# Altium PCB Mikrolysreklamen17.PcbDoc (part 1 of 2)
Units mm, origin at the board's own origin, x right, y up, seen from the top; angles counter-clockwise.
Board outline 168.74 x 42.98 mm, 2 copper layers (Top Layer, Bottom Layer), stack 1.671 mm thick; 124 components, 180 nets, 652 pads, 157 vias.
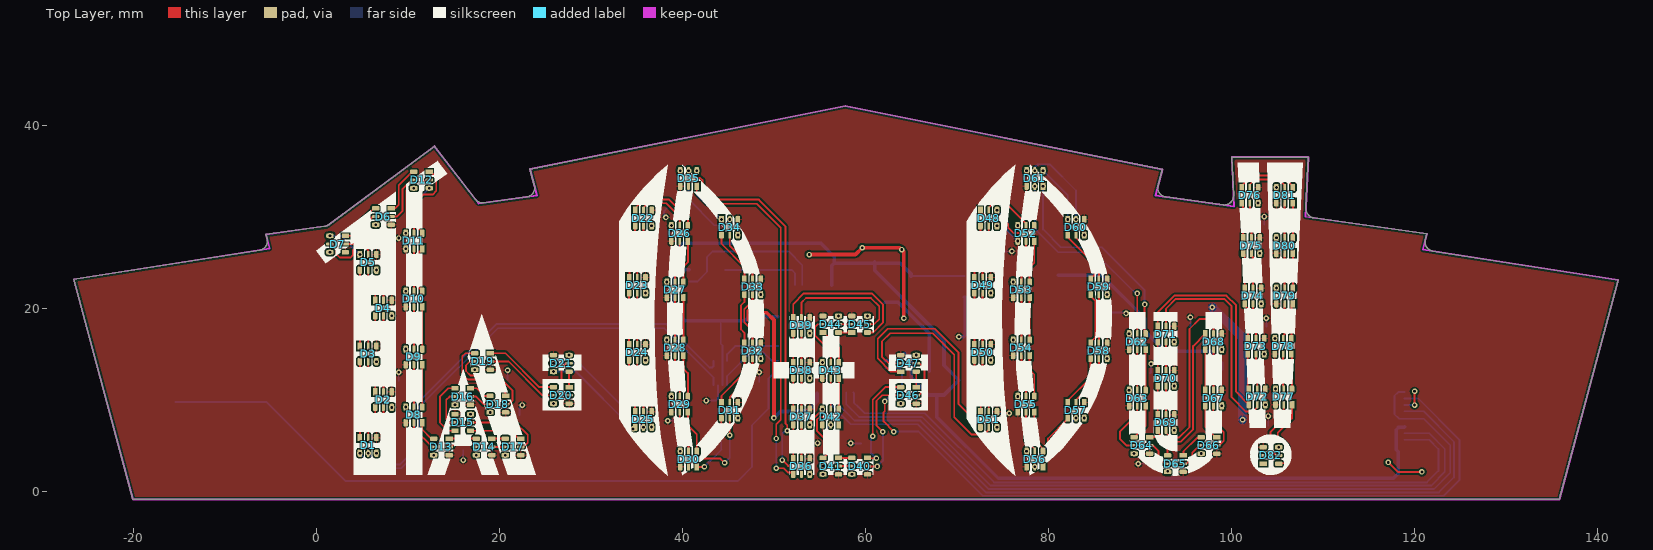
[diagram p0: Top Layer view]
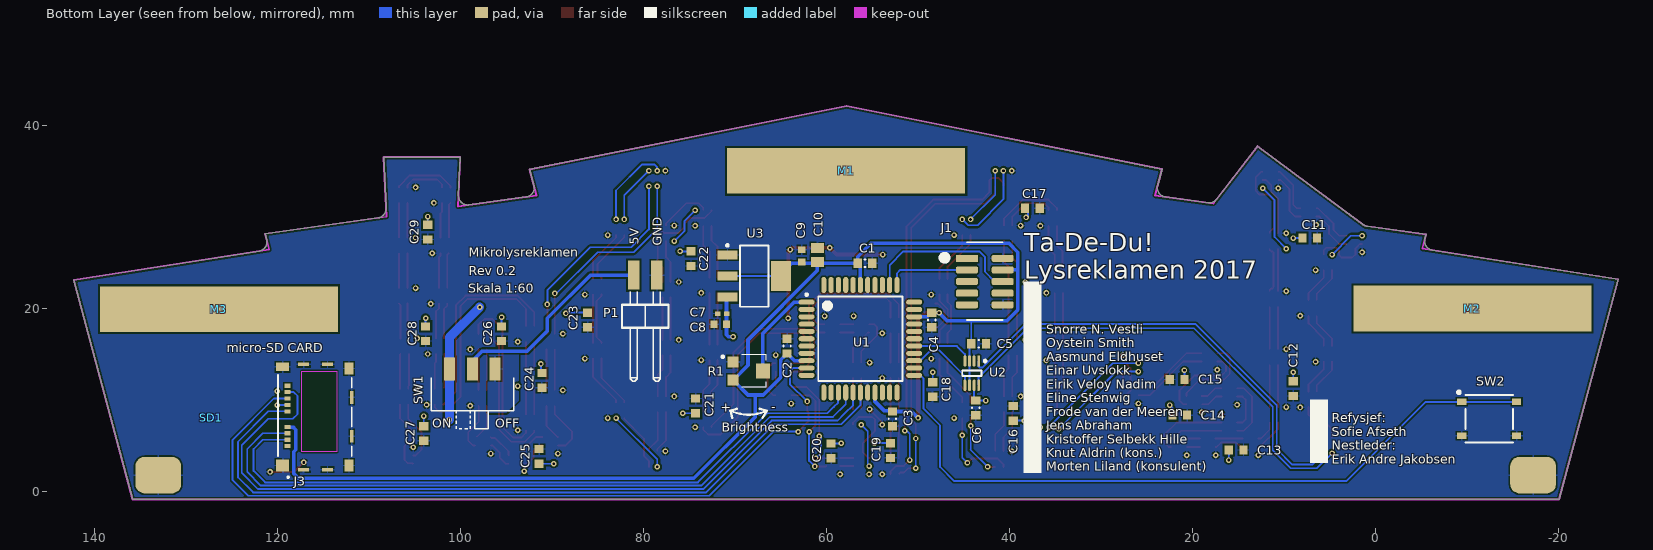
[diagram p1: Bottom Layer view, seen from below]
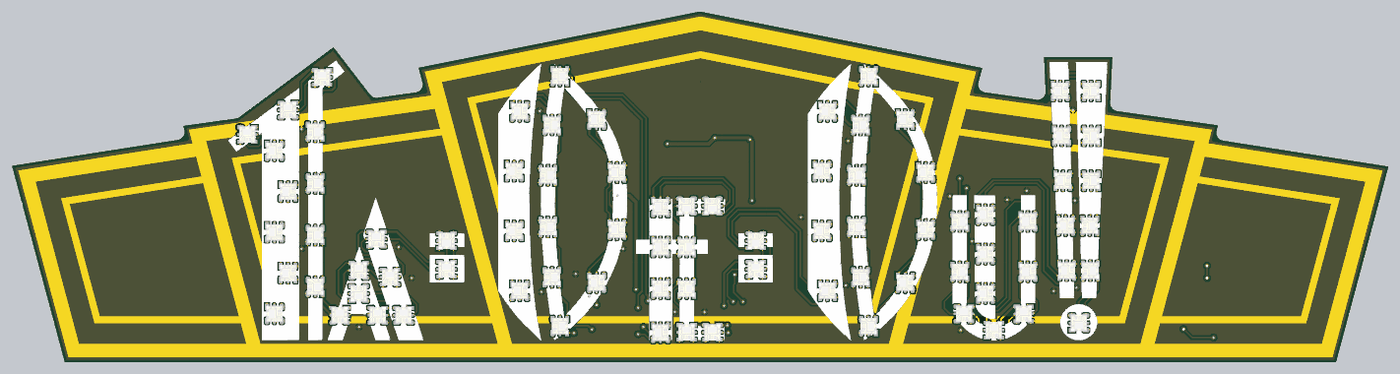
[diagram p3: 3D render of the assembled board from above, using the file's embedded part models]

## Layer stack, top to bottom
Top Solder: solder mask 0.0102, Solder Resist, Dk 3.5
Top Layer: signal copper 0.0356
Dielectric 1: dielectric 1.6, FR-4, Dk 4.8
Bottom Layer: signal copper 0.0356
Bottom Solder: solder mask 0.0102, Solder Resist, Dk 3.5

## Board outline
-20.039,-0.9 -26.498,23.158 -6.22,26.325 -6.22,26.324 ccw(c-6.347,27.315) -5.38,27.57 -5.508,28.048 0.92,28.953 ccw(c0.793,29.945) 1.422,29.168 12.906,37.694 17.39,31.875 ccw(c18.174,32.495) 18.339,31.509 22.98,32.155 ccw(c22.853,33.147) 23.82,33.402 23.818,33.401 23.335,35.187 57.8,42.08 92.449,35.15 91.965,33.361 ccw(c92.941,33.144) 92.83,32.151 99.059,31.274 ccw(c99.214,32.262) 100.213,32.32 100.022,36.503 108.394,36.497 108.13,30.91 ccw(c109.128,30.849) 109.024,29.854 109.024,29.853 121.34,28.119 121.166,27.448 ccw(c122.14,27.221) 122.01,26.23 142.242,23.068 135.825,-0.9

## Design rules (kind name [scope] priority, off if disabled: settings)
Clearance [All] p1: gap=0.2 ignorepadtopadclearanceinfootprint=FALSE except(0: Arc-Hole Track-Hole SMDPad-Hole THPad-Hole Via-Hole Fill-Hole Poly-Hole Region-Hole Text-Hole; 0.15: Arc-Arc Arc-Track Track-Track)
DiffPairsRouting [All] p1: maxlimit=0.254 minlimit=0.254 mostfreqgap=0.254 substack1={9E7FAFDF-2B63-4549-80CD-55CEDA884390} toplayer_{9e7fafdf-2b63-4549-80cd-55ceda884390}_minwidth=0.381 toplayer_{9e7fafdf-2b63-4549-80cd-55ceda884390}_maxwidth=0.381 toplayer_{9e7fafdf-2b63-4549-80cd-55ceda884390}_prefwidth=0.381 bottomlayer_{9e7fafdf-2b63-4549-80cd-55ceda884390}_minwidth=0.381 bottomlayer_{9e7fafdf-2b63-4549-80cd-55ceda884390}_maxwidth=0.381 bottomlayer_{9e7fafdf-2b63-4549-80cd-55ceda884390}_prefwidth=0.381 toplayer_minwidth=0.381 toplayer_maxwidth=0.381 toplayer_prefwidth=0.381 bottomlayer_minwidth=0.381 bottomlayer_maxwidth=0.381 bottomlayer_prefwidth=0.381 maxuncoupledlength=12.7
MinimumSolderMaskSliver [All] p1: minsoldermaskwidth=0.15
PolygonConnect [All] p1: connectstyle=Relief reliefconductorwidth=0.2 reliefentries=4 polygonreliefangle="90 Angle" airgapwidth=0.15
RoutingVias [All] p1: holewidth=0.3 width=0.6 viastyle="Through Hole" minholewidth=0.3 minwidth=0.6 maxholewidth=0.6 maxwidth=1.2
SilkToSolderMaskClearance [IsPad] p1: minsilkscreentomaskgap=0.1 clearancetoexposedcopper=TRUE
SolderMaskExpansion SolderMaskExpansion_via [IsVia] p1: expansion=0.102 istentingtop=TRUE
SolderMaskExpansion [All] p2: expansion=0.05 istentingtop=FALSE
Width [All] p1: maxlimit=4 minlimit=0.15 preferedwidth=0.2 substack1={9E7FAFDF-2B63-4549-80CD-55CEDA884390}
27 further rules are at their usual default settings.

## Classes and differential pairs
component class Mikrolysreklamen17: C1 C2 C3 C4 C5 C6 C7 C8 C9 C10 J1 J3 M1 M2 M3 P1 R1 SD1 SW1 SW2 U1 U2 U3
component class LEDs: C11 C12 C13 C14 C15 C16 C17 C18 C19 C20 C21 C22 C23 C24 C25 C26 C27 C28 C29 D1 D2 D3 D4 D5 D6 D7 D8 D9 D10 D11 D12 D13 D14 D15 D16 D17 D18 D19 D20 D21 D22 D23 D24 D25 D26 D27 D28 D29 D30 D31 D32 D33 D34 D35 D36 D37 D38 D39 D40 D41 D42 D43 D44 D45 D46 D47 D48 D49 D50 D51 D52 D53 D54 D55 D56 D57 D58 D59 D60 D61 D62 D63 D64 D65 D66 D67 D68 D69 D70 D71 D72 D73 D74 D75 D76 D77 D78 D79 D80 D81 D82

## Components (designator, comment, footprint, x,y, rotation, side; value= is the part's Value field where it differs from the comment)
C1 "100nF" CAPC0603(1608)55_N 55.8,24.9 r0 bottom
C2 "100nF" CAPC0603(1608)55_N 64.3,15.85 r270 bottom
C3 "100nF" CAPC0603(1608)55_N 52.8,7.9 r90 bottom
C4 "100nF" CAPC0603(1608)55_N 48.5,18.7 r90 bottom
C5 "100nF" CAPC0603(1608)55_N 43.379,16.1 r0 bottom
C6 "100nF" CAPC0603(1608)55_N 43.7,9.1 r90 bottom
C7 "100nF" CAPC1005X04L 71.4,19.4 r180 bottom
C8 "10µF" CAPC1608X06L 71.6,18.25 r180 bottom
C9 "10µF" CAPC1608X06L 62.7,25.7 r270 bottom
C10 "100µF" CAPC2012X11L 61,25.8 r270 bottom
C11 "100nF" CAPC0603(1608)55_N 7.2,27.65 r0 bottom
C12 "100nF" CAPC0603(1608)55_N 9,11.2 r90 bottom
C13 "100nF" CAPC0603(1608)55_N 15.25,4.5 r0 bottom
C14 "100nF" CAPC0603(1608)55_N 21.4,8.3 r0 bottom
C15 "100nF" CAPC0603(1608)55_N 21.7,12.2 r180 bottom
C16 "100nF" CAPC0603(1608)55_N 39.6,8.5 r270 bottom
C17 "100nF" CAPC0603(1608)55_N 37.5,30.9 r0 bottom
C18 "100nF" CAPC0603(1608)55_N 48.4,11.1 r90 bottom
C19 "100nF" CAPC0603(1608)55_N 53,4.433 r90 bottom
C20 "100nF" CAPC0603(1608)55_N 59.5,4.4 r90 bottom
C21 "100nF" CAPC0603(1608)55_N 74.3,9.317 r270 bottom
C22 "100nF" CAPC0603(1608)55_N 74.8,25.4 r90 bottom
C23 "100nF" CAPC0603(1608)55_N 86.1,18.7 r90 bottom
C24 "100nF" CAPC0603(1608)55_N 91.1,12.1 r90 bottom
C25 "100nF" CAPC0603(1608)55_N 91.4,3.8 r270 bottom
C26 "100nF" CAPC0603(1608)55_N 95.5,17.2 r90 bottom
C27 "100nF" CAPC0603(1608)55_N 104,6.3 r90 bottom
C28 "100nF" CAPC0603(1608)55_N 103.8,17.2 r90 bottom
C29 "100nF" CAPC0603(1608)55_N 103.567,28.3 r90 bottom
D1 "APA102 2020" APA_RGB_LED_2020 5.667,5 r270 top
D2 "APA102 2020" APA_RGB_LED_2020 7.333,10 r270 top
D3 "APA102 2020" APA_RGB_LED_2020 5.667,15 r270 top
D4 "APA102 2020" APA_RGB_LED_2020 7.333,20 r270 top
D5 "APA102 2020" APA_RGB_LED_2020 5.667,25 r270 top
D6 "APA102 2020" APA_RGB_LED_2020 7.333,30 r180 top
D7 "APA102 2020" APA_RGB_LED_2020 2.333,27 r180 top
D8 "APA102 2020" APA_RGB_LED_2020 10.667,8.333 r90 top
D9 "APA102 2020" APA_RGB_LED_2020 10.667,14.667 r90 top
D10 "APA102 2020" APA_RGB_LED_2020 10.667,21 r90 top
D11 "APA102 2020" APA_RGB_LED_2020 10.667,27.333 r90 top
D12 "APA102 2020" APA_RGB_LED_2020 11.5,34 r180 top
D13 "APA102 2020" APA_RGB_LED_2020 13.667,4.833 r180 top
D14 "APA102 2020" APA_RGB_LED_2020 18.333,4.833 r180 top
D15 "APA102 2020" APA_RGB_LED_2020 16,7.5 r0 top
D16 "APA102 2020" APA_RGB_LED_2020 16,10.333 r180 top
D17 "APA102 2020" APA_RGB_LED_2020 21.5,4.833 r180 top
D18 "APA102 2020" APA_RGB_LED_2020 19.833,9.5 r180 top
D19 "APA102 2020" APA_RGB_LED_2020 18.167,14.167 r180 top
D20 "APA102 2020" APA_RGB_LED_2020 26.767,10.467 r180 top
D21 "APA102 2020" APA_RGB_LED_2020 26.767,13.967 r0 top
D22 "APA102 2020" APA_RGB_LED_2020 35.733,29.833 r270 top
D23 "APA102 2020" APA_RGB_LED_2020 35.067,22.5 r270 top
D24 "APA102 2020" APA_RGB_LED_2020 35.067,15.167 r270 top
D25 "APA102 2020" APA_RGB_LED_2020 35.733,7.833 r270 top
D26 "APA102 2020" APA_RGB_LED_2020 39.7,28.167 r90 top
D27 "APA102 2020" APA_RGB_LED_2020 39.2,22 r90 top
D28 "APA102 2020" APA_RGB_LED_2020 39.2,15.667 r90 top
D29 "APA102 2020" APA_RGB_LED_2020 39.7,9.5 r90 top
D30 "APA102 2020" APA_RGB_LED_2020 40.667,3.5 r90 top
D31 "APA102 2020" APA_RGB_LED_2020 45.167,8.833 r270 top
D32 "APA102 2020" APA_RGB_LED_2020 47.667,15.333 r270 top
D33 "APA102 2020" APA_RGB_LED_2020 47.667,22.333 r270 top
D34 "APA102 2020" APA_RGB_LED_2020 45.167,28.833 r270 top
D35 "APA102 2020" APA_RGB_LED_2020 40.667,34.167 r90 top
D36 "APA102 2020" APA_RGB_LED_2020 53,2.7 r270 top
D37 "APA102 2020" APA_RGB_LED_2020 53,8.1 r270 top
D38 "APA102 2020" APA_RGB_LED_2020 53,13.2 r270 top
D39 "APA102 2020" APA_RGB_LED_2020 53,18.1 r270 top
D40 "APA102 2020" APA_RGB_LED_2020 59.367,2.733 r180 top
D41 "APA102 2020" APA_RGB_LED_2020 56.2,2.733 r180 top
D42 "APA102 2020" APA_RGB_LED_2020 56.2,8.1 r90 top
D43 "APA102 2020" APA_RGB_LED_2020 56.2,13.2 r90 top
D44 "APA102 2020" APA_RGB_LED_2020 56.2,18.233 r0 top
D45 "APA102 2020" APA_RGB_LED_2020 59.367,18.233 r0 top
D46 "APA102 2020" APA_RGB_LED_2020 64.7,10.467 r180 top
D47 "APA102 2020" APA_RGB_LED_2020 64.7,13.967 r0 top
D48 "APA102 2020" APA_RGB_LED_2020 73.467,29.833 r270 top
D49 "APA102 2020" APA_RGB_LED_2020 72.8,22.5 r270 top
D50 "APA102 2020" APA_RGB_LED_2020 72.8,15.167 r270 top
D51 "APA102 2020" APA_RGB_LED_2020 73.467,7.833 r270 top
D52 "APA102 2020" APA_RGB_LED_2020 77.533,28.167 r90 top
D53 "APA102 2020" APA_RGB_LED_2020 77.033,22 r90 top
D54 "APA102 2020" APA_RGB_LED_2020 77.033,15.667 r90 top
D55 "APA102 2020" APA_RGB_LED_2020 77.533,9.5 r90 top
D56 "APA102 2020" APA_RGB_LED_2020 78.5,3.5 r90 top
D57 "APA102 2020" APA_RGB_LED_2020 83,8.833 r270 top
D58 "APA102 2020" APA_RGB_LED_2020 85.5,15.333 r270 top
D59 "APA102 2020" APA_RGB_LED_2020 85.5,22.333 r270 top
D60 "APA102 2020" APA_RGB_LED_2020 83,28.833 r270 top
D61 "APA102 2020" APA_RGB_LED_2020 78.5,34.167 r90 top
D62 "APA102 2020" APA_RGB_LED_2020 89.7,16.333 r90 top
D63 "APA102 2020" APA_RGB_LED_2020 89.7,10.167 r90 top
D64 "APA102 2020" APA_RGB_LED_2020 90.2,5 r180 top
D65 "APA102 2020" APA_RGB_LED_2020 93.867,3 r180 top
D66 "APA102 2020" APA_RGB_LED_2020 97.533,5 r180 top
D67 "APA102 2020" APA_RGB_LED_2020 98.033,10.167 r270 top
D68 "APA102 2020" APA_RGB_LED_2020 98.033,16.333 r270 top
D69 "APA102 2020" APA_RGB_LED_2020 92.833,7.5 r270 top
D70 "APA102 2020" APA_RGB_LED_2020 92.833,12.333 r270 top
D71 "APA102 2020" APA_RGB_LED_2020 92.833,17.167 r270 top
D72 "APA102 2020" APA_RGB_LED_2020 102.8,10.3 r270 top
D73 "APA102 2020" APA_RGB_LED_2020 102.667,15.833 r270 top
D74 "APA102 2020" APA_RGB_LED_2020 102.333,21.333 r270 top
D75 "APA102 2020" APA_RGB_LED_2020 102.167,26.833 r270 top
D76 "APA102 2020" APA_RGB_LED_2020 102,32.333 r270 top
D77 "APA102 2020" APA_RGB_LED_2020 105.7,10.3 r90 top
D78 "APA102 2020" APA_RGB_LED_2020 105.633,15.833 r90 top
D79 "APA102 2020" APA_RGB_LED_2020 105.8,21.333 r90 top
D80 "APA102 2020" APA_RGB_LED_2020 105.8,26.833 r90 top
D81 "APA102 2020" APA_RGB_LED_2020 105.8,32.333 r90 top
D82 "APA102 2020" APA_RGB_LED_2020 104.3,3.9 r0 top
J1 "Header SMD 127 2x5" SMDHDRV10P127_2X5_615X330X560B 42.7,22.9 r180 bottom
J3 "MEM2085-00-115-00-A_REV0.2" GCT_MEM2085-00-115-00-A_REV0.2 115.9,8.1 r270 bottom
M1 "Imponatornål" Imponatornaal_liten 57.85,35 r180 top
M2 "Imponatornål" Imponatornaal_liten -10.57,19.95 r180 top
M3 "Imponatornål" Imponatornaal_liten 126.39,19.88 r180 top
P1 "Pin List 1x2, Angled" LIST_ANG_1x2-SMD-2.54MM 79.8,23.6 r180 bottom
R1 "TC33X-2-103E" TRIM_TC33X-2-103E 68.4,13.125 r180 bottom
SD1 "Micro SD kort" microsdcard 127.2,8 r270 bottom
SW1 "Switch" JS102011SAQN 98.7,10.6 r180 bottom
SW2 "PTS526 spst-no Pushbutton" PTS526_SK15_SMTR2_LFS -12.4,7.9 r180 bottom
U1 "AVR ATXMEGA64A4U-AU" TQFP80P1200X1200X120-44N 56.3,16.65 r180 bottom
U2 "TXS0102DCUR" TSSOP50P310X90-8N 44.129,12.891 r270 bottom
U3 "TLV1117" SOT230P700X180-4N 67.9,23.5 r180 bottom

## Footprints (in the part's own frame and the unit in brackets; to place one, negate y for a bottom-side part, rotate by r counter-clockwise, add the part's x,y. Pads: shape width x height; smd on the part's side, far side on the other; paste and mask are expansions set on the pad)
APA_RGB_LED_2020 [mm]
  rrect50% 0.8x0.5 smd: 1(-0.85,0.9) 4(0.85,-0.9) 6(0.85,0.9)
  rrect50% 0.8x0.3 smd: 2(-0.85,0) 5(0.85,0)
  rect 0.8x0.5 smd: 3(-0.85,-0.9)
  silkscreen extent -1.41,-1.31 1.41,1.31, body extent -1,-1 1,1, height 0.9
CAPC0603(1608)55_N [mm] "Chip Capacitor, Body 1.6x0.8mm, Height 0.55mm, IPC Medium Density"
  rect 0.9x1 smd: 1(-0.8,0) 2(0.8,0)
  silkscreen extent -0.05,-0.4 0.05,0.4, body extent -0.87,-0.48 0.88,0.47, height 0.55
CAPC1005X04L [mm] "Chip Capacitor, 2-Leads, Body 1.0x0.5mm, IPC High Density"
  rect 0.6x0.5 smd: 1(-0.5,0) 2(0.5,0)
  body extent -0.51,-0.25 0.51,0.25, height 0.5
CAPC1608X06L [mm] "Chip Capacitor, 2-Leads, Body 1.6x0.8mm, IPC High Density"
  rect 0.75x0.8 smd: 1(-0.675,0) 2(0.675,0)
  body extent -0.8,-0.43 0.8,0.43, height 0.8
CAPC2012X11L [mm] "Chip Capacitor, 2-Leads, Body 2.0x1.3mm, IPC High Density"
  rect 1.1x1.4 smd: 1(-0.75,0) 2(0.75,0)
  body extent -1,-0.62 1,0.63, height 0.77
GCT_MEM2085-00-115-00-A_REV0.2 [mm]
  rect 0.45x0.7 smd: CD(-2.02,-2.99) P1(3.18,-2.99) P2(2.48,-2.99) P3(1.78,-2.99) P4(1.08,-2.99) P5(-0.62,-2.99) P6(-1.32,-2.99) P7(-2.72,-2.99) P8(-3.42,-2.99)
  rect 0.95x1.4 smd: G1(-5.475,-3.53)
  rect 1.3x1.4 smd: G2(5.3,-3.53)
  rect 0.4x1.2 smd: G3(5.75,-1.23) G4(5.75,1.37) G9(-5.75,1.37) G10(-5.75,-1.23)
  rect 1.3x1 smd: G5(5.3,3.73) G8(-5.3,3.73)
  rect 1.4x0.4 smd: G6(2.11,4.03) G7(-2.14,4.03)
  Top Layer keep-out region: 3.8,-1.44 -5,-1.44 -5,2.41 3.8,2.41
  silkscreen extent -4.6,-4.03 6.68,4.03, body extent -5.82,-4.06 5.82,4.1, height 1.14
Imponatornaal_liten [mm]
  rect 26x5 smd far side paste-4: 0(0,0)
JS102011SAQN [mm] "Slide Switches - SPDT, SMD, ON-ON"
  rect 1.2x2.5 smd: 1(-2.5,2.75) 2(0,2.75) 3(2.5,2.75)
  silkscreen extent -4.5,-3.8 4.5,1.8, body extent -4.52,-3.8 4.52,3.75, height 3.5
LIST_ANG_1x2-SMD-2.54MM [mm] "Pin List, 2.54mm, Surface Mount, Angled"
  rect 1.27x3.18 smd paste-4: 1(-1.27,0) 2(1.27,0)
  silkscreen extent -2.54,-11.58 2.54,-1.8, body extent -2.56,-11.61 2.52,1.35, height 3.03
microsdcard [mm]
  body extent -5.51,0 5.51,15, height 1
PTS526_SK15_SMTR2_LFS [mm]
  rect 1x0.7 smd: 1(-3,1.85) 2(3,1.85) 3(-3,-1.85) 4(3,-1.85)
  silkscreen extent -3.45,-2.6 2.6,3.05, body extent -3.2,-2.6 3.2,2.6, height 1.5
SMDHDRV10P127_2X5_615X330X560B [mm] "SMD 2X5 Vertical Header"
  rect 2.4x0.76 smd paste-4: 1(-1.95,2.54)
  rrect50% 2.4x0.76 smd paste-4: 2(1.95,2.54) 3(-1.95,1.27) 4(1.95,1.27) 5(-1.95,0) 6(1.95,0) 7(-1.95,-1.27) 8(1.95,-1.27) 9(-1.95,-2.54) 10(1.95,-2.54)
  silkscreen extent -4.54,-4.21 1.95,4.29
SOT230P700X180-4N [mm] "SOT223, 4-Leads, Body 6,50x7,00mm (avg), Pitch 2,30mm, IPC Medium Density"
  rect 2.15x1 smd: 1(-2.925,2.3) 2(-2.925,0) 3(-2.925,-2.3)
  rect 2.15x3.25 smd: 4(2.925,0)
  silkscreen extent -3.05,-3.35 1.55,3.47, body extent -3.54,-3.25 3.54,3.25, height 1.65
TQFP80P1200X1200X120-44N [mm] "TQFP, 44-Leads, Body 10,00x10,00mm, Pitch 0,80mm, IPC Medium Density"
  oval 1.75x0.55 smd: 1(-5.875,4) 2(-5.875,3.2) 3(-5.875,2.4) 4(-5.875,1.6) 5(-5.875,0.8) 6(-5.875,0) 7(-5.875,-0.8) 8(-5.875,-1.6) 9(-5.875,-2.4) 10(-5.875,-3.2) 11(-5.875,-4) 23(5.875,-4) 24(5.875,-3.2) 25(5.875,-2.4) 26(5.875,-1.6) 27(5.875,-0.8) 28(5.875,0) 29(5.875,0.8) 30(5.875,1.6) 31(5.875,2.4) 32(5.875,3.2) 33(5.875,4)
  oval 0.55x1.75 smd: 12(-4,-5.875) 13(-3.2,-5.875) 14(-2.4,-5.875) 15(-1.6,-5.875) 16(-0.8,-5.875) 17(0,-5.875) 18(0.8,-5.875) 19(1.6,-5.875) 20(2.4,-5.875) 21(3.2,-5.875) 22(4,-5.875) 34(4,5.875) 35(3.2,5.875) 36(2.4,5.875) 37(1.6,5.875) 38(0.8,5.875) 39(0,5.875) 40(-0.8,5.875) 41(-1.6,5.875) 42(-2.4,5.875) 43(-3.2,5.875) 44(-4,5.875)
  silkscreen extent -6,-4.6 4.6,4.95, body extent -6.03,-5.97 5.97,6.03, height 1.1
TRIM_TC33X-2-103E [mm]
  rect 1.2x1.2 smd: 1(-1.8,1) 3(-1.8,-1)
  rect 1.5x1.6 smd: 2(1.45,0)
  silkscreen extent -3.07,-1.8 1.8,1.8, body extent -1.91,-1.8 2.05,1.8, height 1.13
TSSOP50P310X90-8N [mm] "TSSOP, 8-Leads, Body 2,1x2,4mm (max), Pitch 0,50mm, IPC Medium Density"
  oval 1.25x0.3 smd mask+0.12: 1(-1.325,0.75) 2(-1.325,0.25) 3(-1.325,-0.25) 4(-1.325,-0.75) 5(1.325,-0.75) 6(1.325,-0.25) 7(1.325,0.25) 8(1.325,0.75)
  silkscreen extent -1.45,-1.05 0.3,1.57, body extent -1.55,-1.05 1.55,1.05, height 0.8

## Part data
C1 C2 C3 C4 C5 C6 C11 C12 C13 C14 C15 C16 C17 C18 C19 C20 C21 C22 C23 C24 C25 C26 C27 C28 C29: library part 5152, antall=985, beskrivelse="X7R 50V 5%", dybde=0, elektrisk_verdi=100nF, hylle=0, id=5152, komponenttype=2, lager_type=Baklager, leverandor=Farnell, leverandor_varenr=1759122, navn=100nF, nokkelord="Kondensator, Capacitor, CAP", pakke_opprettet="18/02/2015 14:18:13", pakke_opprettet_av=815, pakketype=0603, pris=1, produsent=Multicomp, rad=21, rom=OV, symbol_opprettet="14/11/2014 20:19:34", symbol_opprettet_av=815
C7: library part C0402-100n, "Capacitor, X7R, ±10%", Artikkelnr Noca=20039200, Artikkelnr Simpro=N.A., Footprint Doc=0402, LatestRevisionDate=2009-11-23, Note=16V, Part Number=C0402-100n, Pin Count=2, Published=2009-05-08, Publisher="Nordic Semiconductor"
C8 C9: library part C0603-10µ, "Capacitor, X5R, ±20%", Artikkelnr Noca=20039234, Artikkelnr Simpro=N.A., Footprint Doc=0603, LatestRevisionDate=2011-01-17, Note=6.3V, Part Number=C0603-10µ, Pin Count=2, Published=2011-01-17, Publisher="Nordic Semiconductor"
C10: library part C0805-TBD, "Chip Cap 0805", Artikkelnr Noca=N.A., Artikkelnr Simpro=N.A., Footprint Doc=0805, LatestRevisionDate=2013-12-17, Note="Chip Cap", Part Number=C0805-TBD, Pin Count=2, Published=2013-12-17, Publisher="Nordic Semiconductor"
D1 D2 D3 D4 D5 D6 D7 D8 D9 D10 D11 D12 D13 D14 D15 D16 D17 D18 D19 D20 D21 D22 D23 D24 D25 D26 D27 D28 D29 D30 D31 D32 D33 D34 D35 D36 D37 D38 D39 D40 D41 D42 D43 D44 D45 D46 D47 D48 D49 D50 D51 D52 D53 D54 D55 D56 D57 D58 D59 D60 D61 D62 D63 D64 D65 D66 D67 D68 D69 D70 D71 D72 D73 D74 D75 D76 D77 D78 D79 D80 D81 D82: library part 5672, AdaFruit=3341, beskrivelse="2x2mm SMD RGB Addresserbar LED", DigiKey=1528-2392-ND, id=5672, komponenttype=9, leverandor=DigiKey, leverandor_varenr=1528-2392-ND, navn="APA102 2020", nokkelord="Adafruit: 3341", pakke_opprettet="08/02/2020 14:20:14", pakke_opprettet_av=815, pakketype=SMD, pris=0, produsent=Kina, symbol_opprettet="08/02/2020 14:20:38", symbol_opprettet_av=815
J1: library part 2449, "1,27mm Pitch SMD Header", id=2449, navn="Header SMD 127 2x5", nokkelord=JTAG, pakke_opprettet="15.11.2014 18:30:38", pakke_opprettet_av=815, pakketype=101, pris=20, symbol_opprettet="15.11.2014 18:33:29", symbol_opprettet_av=815
J3: library part 6893, "MicroSD Push pull Memory Card Connector", Package=None, Availability="Not in stock", beskrivelse="MICRO SD PUSH-PULL SMT 1.15MM", Check_prices=https://www.snapeda.com/parts/MEM2085-00-115-00-A/Global+Connector+Technology/view-part/?ref=eda, id=6893, komponenttype=11, leverandor=DigiKey, leverandor_varenr=2073-MEM2085-00-115-00-ACT-ND, MF="Global Connector Technology", MP=MEM2085-00-115-00-A, navn="MEM2085 microSDcardHolder", nokkelord="sdcard, microsd", pakke_opprettet="16/04/2023 02:33:45", pakke_opprettet_av=815, pakketype=SMD, Price=None, pris=12, produsent=GCT, produsent_varenr=MEM2085-00-115-00-A, SnapEDA_Link=https://www.snapeda.com/parts/MEM2085-00-115-00-A/Global+Connector+Technology/view-part/?ref=snap, symbol_opprettet="16/04/2023 02:35:20", symbol_opprettet_av=815
M1 M2 M3: library part 3331, "nål til imponatorplate 20mm (Brooch back)", antall=41, dybde=1, hylle=4, id=3331, lager_type=Fremlager, leverandor_varenr=600721, navn=Imponatornål, nokkelord=cchobby.no, pakke_opprettet="15.11.2018 22:49:40", pakke_opprettet_av=815, pakketype=SMD, pris=5, produsent="Jewellery Maker", rad=0, rom=OV, symbol_opprettet="23.10.2015 21:10:45", symbol_opprettet_av=815
P1: library part "Pin List Ang 1x2 SMD, 2.54mm", "Pin List 1x2, 2.54mm (100mil), Right Angled, SMD", Manufacturer=W-CON, Manufacturer Part Number=1125B-1102S0Z135R2, Part number IPS=N.A., Artikkelnr Noca=55010023, ComponentLink1Description=Datasheet, ComponentLink2Description="Supplier link", Footprint Doc=LIST_ANG_1x2-SMD-2.54MM, HelpURL=\\hizz\pro\app9717\Datasheet\connectores\W-CON\1125B-11XXXXZXXXXX.pdf, LatestRevisionDate=2016-05-26, Part Number="Pin List Ang 1x2 SMD, 2.54mm", Pin Count=2, Published=2016-01-22, Publisher="Nordic Semiconductor", Supplier 1=Cabcon, Supplier 2=Samtec, Supplier Part Number 1=1125B-1102S0Z135R2, Supplier Part Number 2=TSM-102-01-L-SH-A
R1: library part 6892, beskrivelse="SMD Trimpot", elektrisk_verdi=10k, id=6892, komponenttype=1, leverandor=DigiKey, leverandor_varenr=TC33X-103ECT-ND, navn=TC33X-2-103E, nokkelord="potentiometer, potmeter, trim, resistor", pakke_opprettet="16/04/2023 02:23:24", pakke_opprettet_av=815, pakketype=SMD, pris=4, produsent=Bourns, produsent_varenr=TC33X-2-103E, symbol_opprettet="03/11/2016 15:34:07", symbol_opprettet_av=815
SD1: library part 3019, antall=-1, dybde=1, hylle=3, id=3019, lager_type=Baklager, navn="Micro SD kort", nokkelord="SD, minnekort", pakke_opprettet="16/04/2023 02:41:18", pakke_opprettet_av=815, pris=70, rad=3, rom=OV, symbol_opprettet="16/04/2023 02:41:09", symbol_opprettet_av=815
SW1: library part JS102011SAQN, "SMD slide Switch (ON-ON)", Manufacturer="C&K Components", Part number IPS=N.A., Supplier Part Number 1=401-1999-1-ND, Artikkelnr Noca=50019064, ComponentLink1Description=Datasheet, ComponentLink2Description="Supplier link", Footprint Doc=JS102011SAQN, HelpURL=http://www.ck-components.com/14398/js_14july11.pdf/, LatestRevisionDate=2011-08-15, Manufacturer Part Number=JS102011SAQN, Part Number=JS102011SAQN, Pin Count=3, Published=2011-08-15, Publisher="Nordic Semiconductor", Supplier 1=Digi-Key, Supplier 2=Mouser, Supplier Part Number 2=611-JS102011SAQN
SW2: library part 6894, beskrivelse="Tactile SMD pushbutton 5.2x5.2mm 1.5mmh, 260gf, spst-no", id=6894, komponenttype=12, leverandor=DigiKey, leverandor_varenr=CKN12221-1-ND, navn="PTS526 spst-no Pushbutton", nokkelord="knapp, button, tactile, spst-no", pakke_opprettet="16/04/2023 03:26:55", pakke_opprettet_av=815, pakketype=SMD, pris=2, produsent=C&K, produsent_varenr="PTS526 SK15 SMTR2 LFS", symbol_opprettet="14/11/2014 21:57:30", symbol_opprettet_av=815
U1: library part 2103, "Mikrokontroller", antall=75, dybde=0, hylle=0, id=2103, kolonne=2, lager_type=Fremlager, navn="AVR ATXMEGA64A4U-AU", pakke_opprettet="22.08.2014 14:00:28", pakke_opprettet_av=774, pakketype=45, pris=0, produsent=Atmel, rad=4, rom=OV, symbol_opprettet="22.08.2014 14:00:55", symbol_opprettet_av=774
U2: "IC VOLT-LEVEL TRANSLATOR 8-US8", Manufacturer="Texas Instruments", Part number IPS=N.A., Supplier Part Number 1=296-21931-1-ND, Artikkelnr Noca=N.A., ComponentLink1Description=Datasheet, ComponentLink2Description="Supplier link", Footprint Doc=8-VFSOP, HelpURL=http://www.ti.com/lit/ds/symlink/txs0102.pdf, LatestRevisionDate=2012-09-06, Manufacturer Part Number=TXS0102DCUR, Note="TEXAS INSTRUMENTS - TXS0102DCUR - IC, TRANSLATOR", Part Number=TXS0102DCUR, Pin Count=8, Published=2012-09-06, Publisher="Nordic Semiconductor", Supplier 1=Digi-Key, Supplier 2=Farnell, Supplier Part Number 2=170-3315
U3: library part TLV1117-33CDCYR, "REG LDO 3.3V 0.8A SOT223", Manufacturer="Texas Instruments", Part number IPS=N.A., Supplier Part Number 1=296-21112-1-ND, Artikkelnr Noca=N.A., ComponentLink1Description=Datasheet, ComponentLink1URL=http://www.ti.com/lit/ds/symlink/tlv1117.pdf, ComponentLink2Description="Supplier link", Footprint Doc=SOT-223, LatestRevisionDate=2018-08-10, Manufacturer Part Number=TLV1117-33CDCYR, Part Number=TLV1117-33CDCYR, Pin Count=4, Published=2018-08-10, Publisher="Nordic Semiconductor", Supplier 1=Digi-Key

## Free pads (board coordinates)
  rrect50% 5x4 smd far side paste-4: 0(-17.2,1.75) 0(133.01,1.75)

## Via types
v1: diameter 0.6, hole 0.3, Top Layer to Bottom Layer, tented both sides, 157 vias

## Nets (pads, with @x,y where several pads share a name; then routed paths per layer and width w, separated by ;. In a path a pad name is that pad's centre, name@x,y a point inside that pad or via, vN(x,y) a via of type N, cw(c..) or ccw(c..) an arc to the next point about the centre after c; other vN are vias at no path point)
BRIGTHNESS: R1.2 U1.1 | length 10.3
  Bottom Layer w0.4: U1.1@62.175,20.65 62.204,20.621 63.579,20.621 66.95,17.25 R1.2@66.95,13.125
CARD_DETECT: J3.CD U1.10 | length 87.6
  Top Layer w0.2: v1(62.1,9.8) 62.1,8.72 61.976,8.596 61.976,7.624 v1(63.1,6.5)
  Bottom Layer w0.2: v1(62.1,9.8) 64,11.7 64,13.125 63.675,13.45 U1.10@62.175,13.45 ; v1(63.1,6.5) 65.8,6.5 72.8,-0.5 123.2,-0.5 124.9,1.2 124.9,5.62 120.4,10.12 J3.CD@118.89,10.12
CKI: D1.5 U2.1 | length 50
  Bottom Layer w0.2: v1(5.667,4.15) 6.917,2.9 9.1,2.9 10.8,4.6 10.8,9.4 19.65,18.25 38.25,18.25 43,13.5 43.25,13.5 43.379,13.629 U2.1@43.379,14.216
DUMMY_NET: SW1.3
GND: C1.1 C2.1 C3.1 C4.1 C5.1 C6.1 C7.1 C8.1 C9.1 C10.1 C11.1 C12.1 C13.1 C14.1 C15.1 C16.1 C17.1 C18.1 C19.1 C20.1 C21.1 C22.1 C23.1 C24.1 C25.1 C26.1 C27.1 C28.1 C29.1 D1.6 D2.6 D3.6 D4.6 D5.6 D6.6 D7.6 D8.6 D9.6 D10.6 D11.6 D12.6 D13.6 D14.6 D15.6 D16.6 D17.6 D18.6 D19.6 D20.6 D21.6 D22.6 D23.6 D24.6 D25.6 D26.6 D27.6 D28.6 D29.6 D30.6 D31.6 D32.6 D33.6 D34.6 D35.6 D36.6 D37.6 D38.6 D39.6 D40.6 D41.6 D42.6 D43.6 D44.6 D45.6 D46.6 D47.6 D48.6 D49.6 D50.6 D51.6 D52.6 D53.6 D54.6 D55.6 D56.6 D57.6 D58.6 D59.6 D60.6 D61.6 D62.6 D63.6 D64.6 D65.6 D66.6 D67.6 D68.6 D69.6 D70.6 D71.6 D72.6 D73.6 D74.6 D75.6 D76.6 D77.6 D78.6 D79.6 D80.6 D81.6 D82.6 J1.2 J1.10 J3.G1 J3.G2 J3.G3 J3.G4 J3.G5 J3.G6 J3.G7 J3.G8 J3.G9 J3.G10 J3.P6 P1.2 pad.0 R1.1 SW2.3 SW2.4 U1.8 U1.18 U1.30 U1.38 U2.2 U3.1 | length 27.1
  Top Layer w0.2: v1(53.9,7.25) 53.9,7.509 55.3,8.909 v1(55.3,8.95) ; v1(117.12,3.14) 118.16,2.1 v1(120.8,2.1) ; v1(120,9.4) v1(120,10.9)
  Top Layer w0.4: v1(53.85,25.85) 58.9,25.85 v1(59.65,26.6) 63.75,26.6 v1(63.95,26.4) 64.2,26.15 v1(64.2,18.9)
  Bottom Layer w0.2: J3.P6@118.89,9.42 119.98,9.42 v1(120,9.4)
  other v1: 55.35,1.833 58.517,1.833 53.9,1.85 93.017,2.16 12.817,3.933 17.483,3.933 20.65,3.933 89.35,4.1 96.683,4.1 6.567,4.15 39.767,4.35 77.6,4.35 105.15,4.8 93.733,6.65 74.367,6.983 36.633,7 46.067,7.983 83.9,7.983 16.85,8.4 19,8.6 8.233,9.15 9.767,9.183 98.933,9.317 15.15,9.45 103.7,9.45 25.917,9.567 63.85,9.567 38.8,10.35 76.633,10.35 88.8,11.017 104.8,11.15 93.733,11.483 53.9,12.35 17.3,13.267 55.3,14.05 6.567,14.15 35.967,14.3 73.7,14.317 48.567,14.483 86.4,14.483 27.617,14.867 65.55,14.867 103.567,14.983 98.933,15.483 9.767,15.517 93.733,16.317 38.3,16.517 76.133,16.517 104.733,16.683 88.8,17.183 53.9,17.25 57.05,19.133 60.217,19.133 8.233,19.15 103.233,20.483 48.567,21.483 86.4,21.483 35.967,21.65 73.7,21.65 9.767,21.85 104.9,22.183 38.3,22.85 76.133,22.85 6.567,24.15 103.067,25.983 1.483,26.1 104.9,27.683 46.067,27.983 83.9,27.983 9.767,28.183 74.367,28.983 36.633,29 38.8,29.017 76.633,29.017 6.483,29.1 102.9,31.483 10.65,33.1 104.9,33.183 39.767,35.017 77.6,35.017
MISO: J3.P7 U1.16 | length 86.5
  Bottom Layer w0.2: U1.16@57.1,10.775 57.1,9.4 58.003,8.497 58.8,7.7 66,7.7 73.48,0.22 122.12,0.22 123.9,2 123.9,5.02 121.02,7.9 118.3,7.9 117.8,8.4 117.8,10.4 118.22,10.82 J3.P7@118.89,10.82
MOSI: J3.P3 U1.15 | length 78.6
  Bottom Layer w0.2: U1.15@57.9,10.775 57.9,9.5 59.3,8.1 66.2,8.1 73.7,0.6 121.8,0.6 123.3,2.1 123.3,4.6 121.58,6.32 J3.P3@118.89,6.32
NetD1_2: D1.2 D2.5 | length 4
  Top Layer w0.2: D1.2@5.667,5.85 5.667,6.667 7.333,8.333 D2.5@7.333,9.15 D2.5@7.333,9.183
NetD1_3: D1.3 D2.4 | length 4
  Top Layer w0.2: D1.3@4.767,5.85 4.767,6.767 6.433,8.433 D2.4@6.433,9.15
NetD2_2: D2.2 D3.5 | length 4
  Top Layer w0.2: D3.5@5.667,14.15 5.667,13.333 7.333,11.667 D2.2@7.333,10.85
NetD2_3: D2.3 D3.4 | length 4
  Top Layer w0.2: D3.4@4.767,14.15 4.767,13.233 6.433,11.567 D2.3@6.433,10.85
NetD3_2: D3.2 D4.5 | length 4
  Top Layer w0.2: D3.2@5.667,15.85 5.667,16.667 7.333,18.333 D4.5@7.333,19.15
NetD3_3: D3.3 D4.4 | length 4
  Top Layer w0.2: D3.3@4.767,15.85 4.767,16.667 6.433,18.333 D4.4@6.433,19.15
NetD4_2: D4.2 D5.5 | length 4
  Top Layer w0.2: D5.5@5.667,24.15 5.667,23.333 7.333,21.667 D4.2@7.333,20.85
NetD4_3: D4.3 D5.4 | length 4
  Top Layer w0.2: D5.4@4.767,24.15 4.767,23.233 6.433,21.567 D4.3@6.433,20.85
NetD5_2: D5.2 D7.5 | length 6.5
  Top Layer w0.2: D7.5@1.483,27 1.733,27 2.2,26.533 2.2,25.897 2.572,25.525 3.75,25.525 4,25.775 4,26.3 4.3,26.6 5.4,26.6 5.667,26.333 D5.2@5.667,25.85
NetD5_3: D5.3 D7.4 | length 4.1
  Bottom Layer w0.2: v1(1.483,27.9) 2.717,27.9 v1(4.767,25.85)
NetD6_2: D6.2 D12.5 | length 5.5
  Top Layer w0.2: D6.2@8.183,30 8.8,30 9.4,30.6 9.4,33 10.4,34 D12.5@10.6,34
NetD6_3: D6.3 D12.4 | length 5.4
  Top Layer w0.2: D6.3@8.183,30.9 8.6,30.9 9,31.3 9,33.4 10.5,34.9 D12.4@10.65,34.9
NetD6_4: D6.4 D7.3 | length 5
  Top Layer w0.2: D7.3@3.183,27.9 4,27.9 4.6,28.5 4.6,29.2 6.3,30.9 D6.4@6.483,30.9
NetD6_5: D6.5 D7.2 | length 5
  Top Layer w0.2: D7.2@3.183,27 4,27 5.1,28.1 5.1,28.957 6.143,30 D6.5@6.483,30
NetD8_2: D8.2 D13.5 | length 3.7
  Top Layer w0.2: D8.2@10.667,7.483 10.667,6.833 12.7,4.8 D13.5@12.9,4.8
NetD8_3: D8.3 D13.4 | length 2.4
  Top Layer w0.2: D8.3@11.567,7.483 11.567,6.733 12.567,5.733 D13.4@12.817,5.733
NetD8_4: D8.4 D9.3 | length 4.6
  Top Layer w0.2: D8.4@11.567,9.183 D9.3@11.567,13.817
NetD8_5: D8.5 D9.2 | length 4.6
  Top Layer w0.2: D8.5@10.667,9.183 D9.2@10.667,13.817
NetD9_4: D9.4 D10.3 | length 4.6
  Top Layer w0.2: D9.4@11.567,15.517 D10.3@11.567,20.15
NetD9_5: D9.5 D10.2 | length 4.6
  Top Layer w0.2: D9.5@10.667,15.517 D10.2@10.667,20.15
NetD10_4: D10.4 D11.3 | length 5.1
  Top Layer w0.2: D10.4@11.567,21.85 11.567,21.986 11.419,22.135 11.293,22.135 11.16,22.267 11.16,26.066 11.277,26.183 11.417,26.183 11.567,26.333 D11.3@11.567,26.483
NetD10_5: D10.5 D11.2 | length 4.6
  Top Layer w0.2: D10.5@10.667,21.85 D11.2@10.667,26.483
NetD11_4: D11.4 D12.3 | length 8.7
  Top Layer w0.2: D11.4@11.567,28.183 11.567,28.333 11.1,28.8 11.1,31.8 11.7,32.4 12.7,32.4 13.1,32.8 13.1,34.3 12.5,34.9 D12.3@12.35,34.9
NetD11_5: D11.5 D12.2 | length 6.7
  Top Layer w0.2: D11.5@10.667,28.183 10.667,31.967 11.4,32.7 11.4,33.4 12,34 D12.2@12.35,34
NetD13_2: D13.2 D14.5 | length 3.4
  Top Layer w0.2: D13.2@14.517,4.833 14.767,4.833 14.817,4.883 14.817,4.886 15.231,5.3 16.896,5.3 17.363,4.833 D14.5@17.483,4.833
NetD13_3: D13.3 D14.4 | length 3
  Top Layer w0.2: D13.3@14.517,5.733 D14.4@17.483,5.733
NetD14_2: D14.2 D17.5 | length 1.5
  Top Layer w0.2: D14.2@19.183,4.833 D17.5@20.65,4.833
NetD14_3: D14.3 D17.4 | length 1.5
  Top Layer w0.2: D14.3@19.183,5.733 D17.4@20.65,5.733
NetD15_2: D15.2 D16.5 | length 4.3
  Top Layer w0.2: D15.2@15.15,7.5 14.533,7.5 14.2,7.833 14.2,9.967 14.567,10.333 D16.5@15.15,10.333
NetD15_3: D15.3 D16.4 | length 6.9
  Top Layer w0.2: D15.3@15.15,6.6 14.4,6.6 13.5,7.5 13.5,10.3 14.433,11.233 D16.4@15.15,11.233
NetD15_4: D15.4 D17.3 | length 5.9
  Top Layer w0.2: D15.4@16.85,6.6 21.25,6.6 22.117,5.733 D17.3@22.35,5.733
NetD15_5: D15.5 D17.2 | length 8.6
  Top Layer w0.2: D15.5@16.85,7.5 21.75,7.5 23.1,6.15 23.1,5.3 22.633,4.833 D17.2@22.35,4.833
NetD16_2: D16.2 D18.5 | length 2.5
  Top Layer w0.2: D16.2@16.85,10.333 17.467,10.333 18.3,9.5 D18.5@18.983,9.5 D18.5@19,9.5
NetD16_3: D16.3 D18.4 | length 2.5
  Top Layer w0.2: D16.3@16.85,11.233 17.517,11.233 18.35,10.4 D18.4@18.983,10.4 D18.4@19.017,10.4
NetD18_2: D18.2 D19.5 | length 9.7
  Top Layer w0.2: D19.5@17.267,14.167 16.767,14.167 16.35,13.75 16.35,13.125 16.834,12.641 19.759,12.641 21.45,10.95 21.45,9.95 21,9.5 D18.2@20.683,9.5
NetD18_3: D18.3 D19.4 | length 9.3
  Top Layer w0.2: D19.4@17.267,15.067 16.3,15.067 15.95,14.717 15.95,12.8 16.55,12.2 19.2,12.2 20.683,10.717 D18.3@20.683,10.4
NetD19_2: D19.2 D20.5 | length 8.4
  Top Layer w0.2: D19.2@19.017,14.167 21,14.167 24.7,10.467 D20.5@25.917,10.467
NetD19_3: D19.3 D20.4 | length 8.4
  Top Layer w0.2: D19.3@19.017,15.067 20.667,15.067 24.367,11.367 D20.4@25.917,11.367
NetD20_2: D20.2 D21.5 | length 4.5
  Top Layer w0.2: D20.2@27.617,10.467 27.283,10.467 26.8,10.95 26.8,13.45 27.317,13.967 D21.5@27.617,13.967
NetD20_3: D20.3 D21.4 | length 1.7
  Top Layer w0.2: D20.3@27.617,11.367 D21.4@27.617,13.067
NetD21_2: D21.2 D25.5 | length 12.7
  Bottom Layer w0.2: v1(25.917,13.967) 28.75,13.967 v1(35.733,6.983)
NetD21_3: D21.3 D25.4 | length 19.9
  Bottom Layer w0.2: v1(25.917,13.067) 28.333,13.067 v1(34.6,6.8) ; 28.342,13.075 v1@34.433,6.983
NetD22_2: D22.2 D26.5 | length 6
  Top Layer w0.2: D22.2@35.733,30.683 35.733,30.983 36.2,31.45 38.25,31.45 39.7,30 D26.5@39.7,29.017
NetD22_3: D22.3 D26.4 | length 8
  Top Layer w0.2: D22.3@34.833,30.7 34.833,30.933 35.75,31.85 38.55,31.85 40.6,29.8 D26.4@40.6,29.017
NetD22_4: D22.4 D23.3 | length 5.8
  Top Layer w0.2: D23.3@34.2,23.45 34.2,26.2 34.833,26.833 D22.4@34.833,28.983
NetD22_5: D22.5 D23.2 | length 5.9
  Top Layer w0.2: D23.2@35.067,23.35 35.067,25.817 35.733,26.483 D22.5@35.733,28.983 D22.5@35.733,29
NetD23_4: D23.4 D24.3 | length 5.5
  Top Layer w0.2: D24.3@34.167,16.133 D23.4@34.167,21.65
NetD23_5: D23.5 D24.2 | length 5.6
  Top Layer w0.2: D24.2@35.067,16.017 D23.5@35.067,21.65
NetD24_4: D24.4 D25.3 | length 5.9
  Top Layer w0.2: D24.4@34.167,14.317 34.167,11.733 34.833,11.067 D25.3@34.833,8.683
NetD24_5: D24.5 D25.2 | length 5.9
  Top Layer w0.2: D24.5@35.067,14.3 35.067,12.083 35.733,11.417 D25.2@35.733,8.683
NetD26_2: D26.2 D27.5 | length 4.7
  Top Layer w0.2: D27.5@39.2,22.85 39.2,25 39.7,25.5 D26.2@39.7,27.317
NetD26_3: D26.3 D27.4 | length 4.7
  Top Layer w0.2: D27.4@40.1,22.85 40.1,24.5 40.6,25 D26.3@40.6,27.317
NetD27_2: D27.2 D28.5 | length 4.6
  Top Layer w0.2: D28.5@39.2,16.517 D27.2@39.2,21.15
NetD27_3: D27.3 D28.4 | length 4.6
  Top Layer w0.2: D28.4@40.1,16.517 D27.3@40.1,21.15
NetD28_2: D28.2 D29.5 | length 4.7
  Top Layer w0.2: D28.2@39.2,14.817 39.2,12.925 39.7,12.425 D29.5@39.7,10.35
NetD28_3: D28.3 D29.4 | length 4.7
  Top Layer w0.2: D28.3@40.1,14.817 40.1,13.4 40.6,12.9 D29.4@40.6,10.35
NetD29_2: D29.2 D30.5 | length 4.7
  Top Layer w0.2: D29.2@39.7,8.65 39.7,6.825 40.667,5.858 D30.5@40.667,4.35
NetD29_3: D29.3 D30.4 | length 4.7
  Top Layer w0.2: D29.3@40.6,8.65 40.6,7.2 41.567,6.233 D30.4@41.567,4.35
NetD30_2: D30.2 D31.5 | length 9.8
  Top Layer w0.2: D30.2@40.667,2.65 40.667,2.917 41.3,3.55 44.15,3.55 v1(44.6,3.1) ; v1(45.167,6.1) D31.5@45.167,7.983
  Bottom Layer w0.2: v1(44.6,3.1) 45.167,3.667 v1(45.167,6.1)
NetD30_3: D30.3 D31.4 | length 7
  Top Layer w0.2: D30.3@41.567,2.65 v1(42.4,2.65) ; v1(44.25,7.15) 44.25,7.967 D31.4@44.267,7.983
  Bottom Layer w0.2: v1(42.4,2.65) 44.267,4.517 44.25,4.533 v1(44.25,7.15)
NetD31_2: D31.2 D32.5 | length 5.8
  Top Layer w0.2: D31.2@45.167,9.683 45.167,10.267 47.667,12.767 D32.5@47.667,14.483
NetD31_3: D31.3 D32.4 | length 5.8
  Top Layer w0.2: D31.3@44.267,9.683 44.267,10.418 46.767,12.918 D32.4@46.767,14.483
NetD32_2: D32.2 D33.5 | length 6.1
  Top Layer w0.2: D32.2@47.667,16.183 47.667,17.533 46.76,18.44 46.76,19.893 47.667,20.8 D33.5@47.667,21.483
NetD32_3: D32.3 D33.4 | length 5.6
  Top Layer w0.2: D32.3@46.767,16.183 46.767,17.3 46.4,17.667 46.4,20.3 46.767,20.667 D33.4@46.767,21.483
NetD33_2: D33.2 D34.5 | length 5.8
  Top Layer w0.2: D34.5@45.167,27.983 45.167,26.833 47.667,24.333 D33.2@47.667,23.183
NetD33_3: D33.3 D34.4 | length 5.8
  Top Layer w0.2: D34.4@44.267,27.983 44.267,27.033 46.767,24.533 D33.3@46.767,23.183
NetD34_2: D34.2 D35.5 | length 9.1
  Bottom Layer w0.2: v1(40.667,35.017) 40.667,31.883 43.5,29.05 44.533,29.05 v1(45.167,29.683)
NetD34_3: D34.3 D35.4 | length 6.5
  Bottom Layer w0.2: v1(41.567,35.017) 41.567,32.383 v1(44.267,29.683)
NetD35_2: D35.2 D36.5 | length 42.6
  Top Layer w0.2: D35.2@40.667,33.317 40.667,33.667 41.2,34.2 41.95,34.2 42.2,33.95 42.2,32.65 43,31.85 48.35,31.85 51.25,28.95 51.25,7.4 51.45,7.2 v1(51.45,6.6) ; v1@51,3.3 51.54,2.76 52.39,2.76 53,2.15 D36.5@53,1.85
  Bottom Layer w0.2: v1(50.9,3.4) 50.9,6.25 v1@51.25,6.6
NetD35_3: D35.3 D36.4 | length 40.1
  Top Layer w0.2: D35.3@41.567,33.317 41.567,32.533 42.7,31.4 48.133,31.4 50.75,28.783 50.75,7.8 50.25,7.3 v1(50.25,5.75) ; v1(50.25,2.5) 51.075,2.5 51.55,2.025 51.952,2.025 52.059,1.918 D36.4@52.059,1.891
  Bottom Layer w0.2: v1(50.25,2.5) v1(50.25,5.75)
NetD36_2: D36.2 D37.5 | length 3.7
  Top Layer w0.2: D36.2@53,3.55 D37.5@53,7.25
NetD36_3: D36.3 D37.4 | length 3.7
  Top Layer w0.2: D36.3@52.1,3.55 D37.4@52.1,7.25
NetD37_2: D37.2 D38.5 | length 3.4
  Top Layer w0.2: D37.2@53,8.95 D38.5@53,12.35
NetD37_3: D37.3 D38.4 | length 3.4
  Top Layer w0.2: D37.3@52.1,8.95 D38.4@52.1,12.35
NetD38_2: D38.2 D39.5 | length 3.2
  Top Layer w0.2: D38.2@53,14.05 D39.5@53,17.25
NetD38_3: D38.3 D39.4 | length 3.2
  Top Layer w0.2: D38.3@52.1,14.05 D39.4@52.1,17.25
NetD39_2: D39.2 D45.5 | length 13.6
  Top Layer w0.2: D39.2@53,18.95 53,20.6 53.5,21.1 60.6,21.1 61.5,20.2 61.5,18.8 60.933,18.233 D45.5@60.217,18.233
NetD39_3: D39.3 D45.4 | length 16.4
  Top Layer w0.2: D39.3@52.1,18.95 52.1,20.425 53.275,21.6 60.7,21.6 61.9,20.4 61.9,18.4 60.833,17.333 D45.4@60.217,17.333
NetD40_2: D40.2 D46.5 | length 11.9
  Top Layer w0.2: D40.2@60.017,2.733 60.05,2.7 v1(61.3,2.7) ; v1(61.9,6.5) 61.2,7.2 61.2,9.85 61.817,10.467 D46.5@63.85,10.467
  Bottom Layer w0.2: v1(61.3,2.7) 61.9,3.3 v1(61.9,6.5)
NetD40_3: D40.3 D46.4 | length 11.4
  Top Layer w0.2: D40.3@60.217,3.633 60.25,3.6 v1(61.2,3.6) v1@61.35,3.6 ; v1(60.8,6) 60.8,10 62.167,11.367 D46.4@63.85,11.367
  Bottom Layer w0.2: v1@60.6,6 60.6,4.2 v1(61.2,3.6)
NetD40_4: D40.4 D41.3 | length 1.5
  Top Layer w0.2: D41.3@57.05,3.633 D40.4@58.517,3.633
NetD40_5: D40.5 D41.2 | length 1.5
  Top Layer w0.2: D41.2@57.05,2.733 D40.5@58.517,2.733
NetD41_4: D41.4 D42.3 | length 8.1
  Top Layer w0.2: D41.4@55.35,3.633 55.433,3.633 56.05,4.25 56.05,5.25 54.7,6.6 54.7,7.8 55,8.1 56.5,8.1 57.1,7.5 D42.3@57.1,7.25
NetD41_5: D41.5 D42.2 | length 4.9
  Bottom Layer w0.2: v1(55.35,2.733) 55.35,2.842 55.5,2.992 55.5,6.55 v1(56.2,7.25)
NetD42_4: D42.4 D43.3 | length 3.4
  Top Layer w0.2: D42.4@57.1,8.95 D43.3@57.1,12.35
NetD42_5: D42.5 D43.2 | length 3.4
  Top Layer w0.2: D42.5@56.2,8.95 D43.2@56.2,12.35
NetD43_4: D43.4 D44.3 | length 4.1
  Top Layer w0.2: D44.3@55.35,17.333 55.467,17.333 57.1,15.7 D43.4@57.1,14.05
NetD43_5: D43.5 D44.2 | length 5.6
  Top Layer w0.2: D44.2@55.35,18.233 54.767,18.233 54.5,17.967 54.5,17 56.2,15.3 D43.5@56.2,14.05
NetD44_4: D44.4 D45.3 | length 1.5
  Top Layer w0.2: D44.4@57.05,17.333 D45.3@58.517,17.333
NetD44_5: D44.5 D45.2 | length 1.5
  Top Layer w0.2: D44.5@57.05,18.233 D45.2@58.517,18.233